# EAGLE board Down Linker ver1.0.0 (EAGLE 9.6.2)
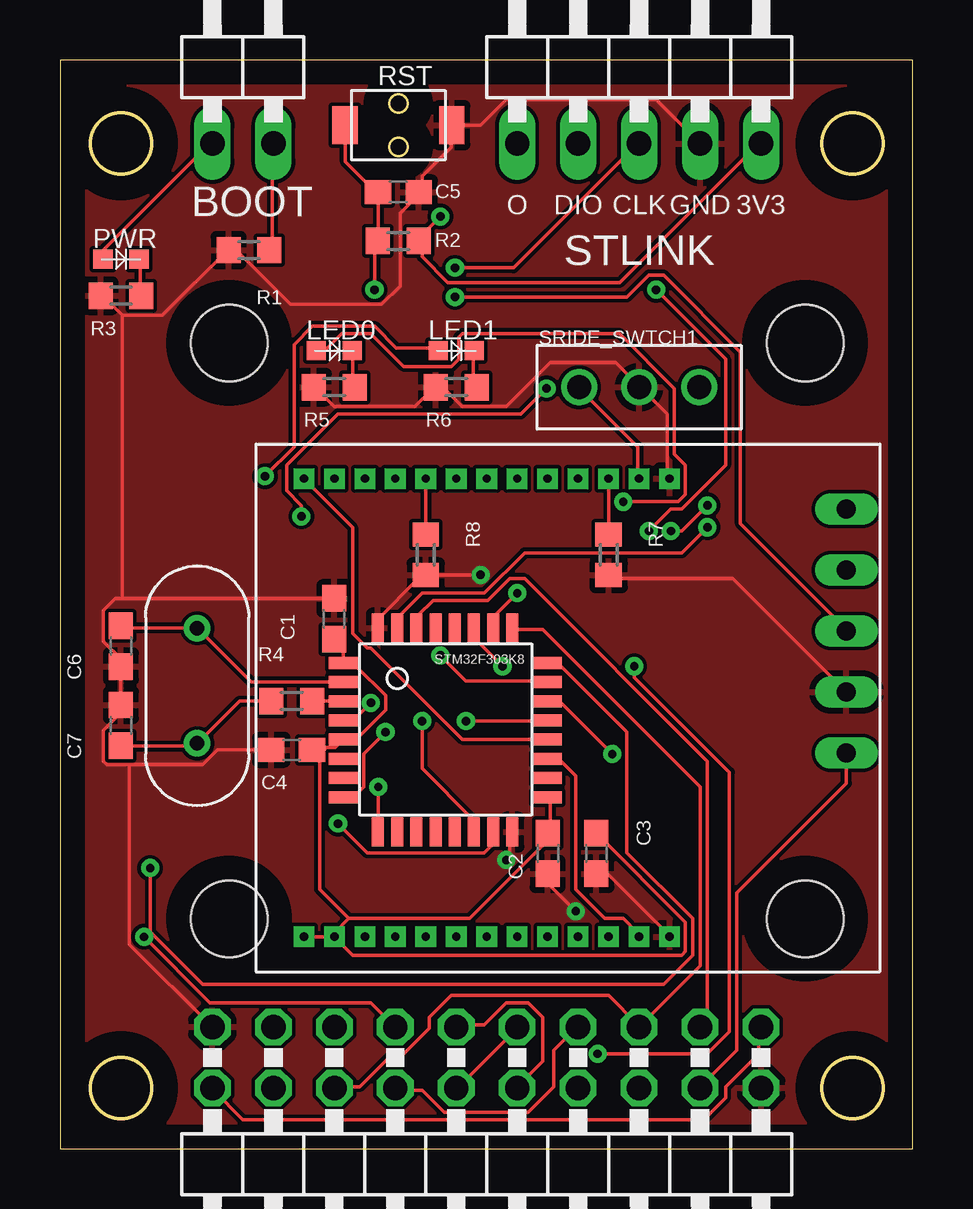
[diagram p0: board, top side]
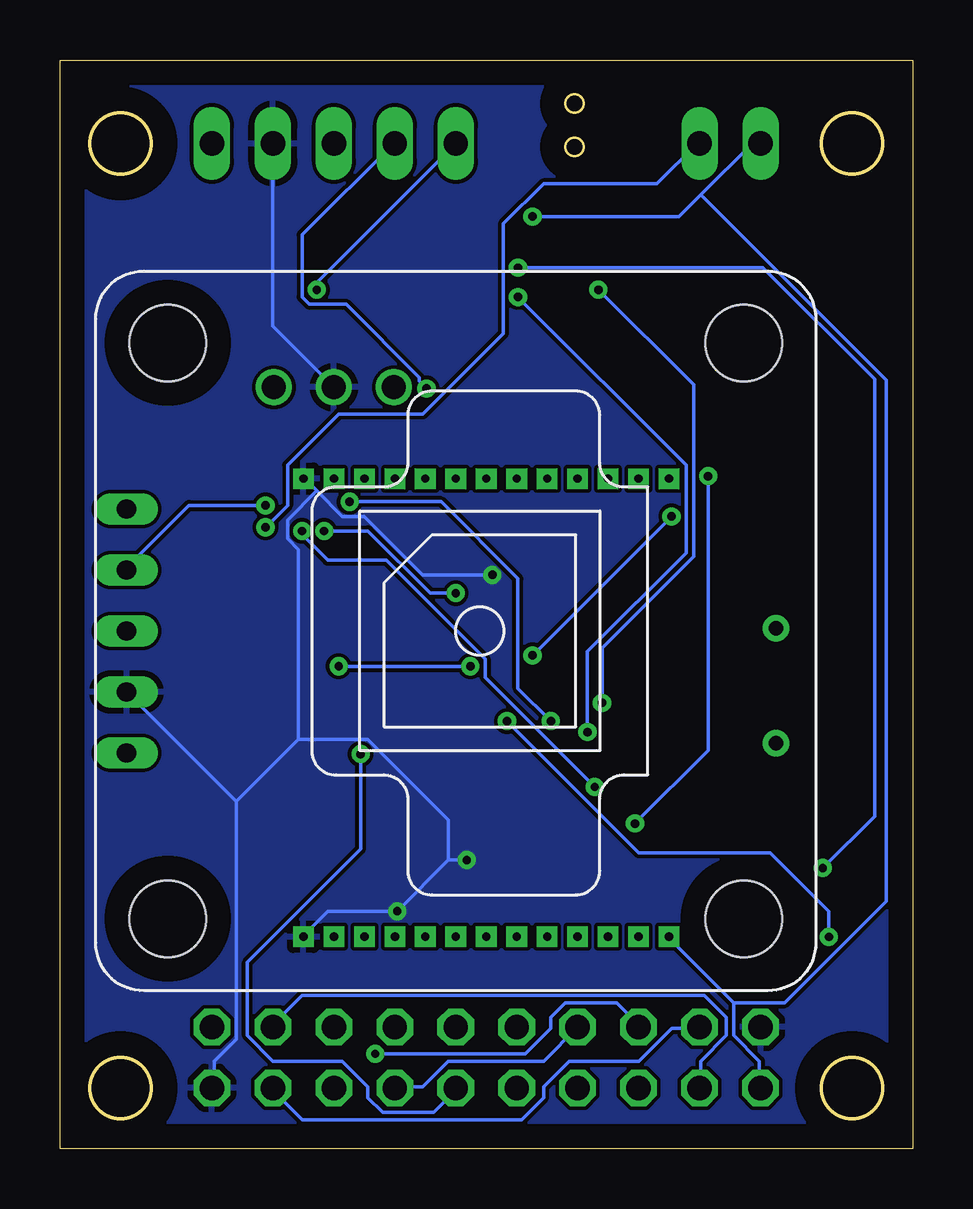
[diagram p1: board, bottom side, seen from below]

Size 35.54 x 45.39 mm. Coordinates in mm from the lower left corner, seen from the top.
Outline: 0,0 35.54,0 35.54,45.39 0,45.39 0,0
Outline: circle at 2.54,2.54 radius 1.27
Outline: circle at 33.02,2.54 radius 1.27
Outline: circle at 33.02,41.91 radius 1.27
Outline: circle at 2.54,41.91 radius 1.27
Copper layers (1*16): Top 0.035mm / dielectric 1.5mm / Bottom 0.035mm
Design rules "default": minimum track width 6mil, minimum drill 0.35mm, track to track 6mil, track to pad 6mil, pad to pad 6mil, via to via 6mil, smd to smd 6mil, copper to edge 40mil, drill to drill 6mil, minimum pad ring 10mil, minimum via ring 8mil, stop-mask expansion 4mil, vias tented up to drill 0mil, thermal gap 10mil

## Footprints (pad centres in the part's own frame; a part is rotated, then mirrored left to right if it is on the bottom)
1X02/90 = drill 1.016 long: 1 -1.27,-3.81; 2 1.27,-3.81
C1608 = smd 1.1 x 1: 1 -0.85,0; 2 0.85,0
CRYSTAL = drill 0.6: P$1 2.4,0; P$2 -2.4,0
2X10/90 = drill 1.016 octagon: 1 -11.43,-6.35; 2 -11.43,-3.81; 3 -8.89,-6.35; 4 -8.89,-3.81; 5 -6.35,-6.35; 6 -6.35,-3.81; 7 -3.81,-6.35; 8 -3.81,-3.81; 9 -1.27,-6.35; 10 -1.27,-3.81; 11 1.27,-6.35; 12 1.27,-3.81; 13 3.81,-6.35; 14 3.81,-3.81; 15 6.35,-6.35; 16 6.35,-3.81; 17 8.89,-6.35; 18 8.89,-3.81; 19 11.43,-6.35; 20 11.43,-3.81
OSXX1608C1A = smd 0.8 x 0.8: AN -0.75,0; CT 0.75,0
R0603 = smd 1 x 1.1: 1 -0.85,0; 2 0.85,0
TVAF06-A020B-R = smd 1.6 x 1.05: P$1 0,2.225; P$2 0,-2.225
SRIDE_SWITCH = drill 1: L -2.5,0; LR 0,0; R 2.5,0
1X05/90 = drill 1.016 long: 1 -5.08,-3.81; 2 -2.54,-3.81; 3 0,-3.81; 4 2.54,-3.81; 5 5.08,-3.81
STM32F303K8 = smd 0.5 x 1.2: BOOT 1.6,8.5; PA3/UART2_RX 0.8,0; PA4/SPI1_NSS 1.6,0; PA5/SPI1_SCK 2.4,0; PA6/SPI1_MISO 3.2,0; PA7/SPI1_MOSI 4,0; PA15/I2C1_SCL 6.4,8.5; PB0 4.8,0; PB1 5.6,0; PB3/SWO 5.6,8.5; PB4 4.8,8.5; PB5 4,8.5; PB6 3.2,8.5; PB7/I2C1_SDA 2.4,8.5; VSS 0.8,8.5; VSS2 6.4,0 | smd 1.2 x 0.5: NRST -0.65,4.65; PA0 -0.65,3.05; PA1 -0.65,2.25; PA2/UART2_TX -0.65,1.45; PA8 7.85,2.25; PA9/UART1_TX 7.85,3.05; PA10/UART1_RX 7.85,3.85; PA11/CAN_RX 7.85,4.65; PA12/CAN_TX 7.85,5.45; PA13/SWDIO 7.85,6.25; PA14/SWCLK 7.85,7.05; PF0 -0.65,6.25; PF1 -0.65,5.45; VDD -0.65,7.05; VDD2 7.85,1.45; VDDA -0.65,3.85
AE-GYSFDMAXB = drill 0.8 long: P1 13.716,5.08; P2 13.716,2.54; P3 13.716,0; P4 13.716,-2.54; P5 13.716,-5.08 | hole 3.2: -12,12; 12,12; 12,-12; -12,-12
RM-92A = drill 0.35 square: - 0,11.43; BOOT0 0,5.08; GND1 0,15.24; GND2 19.1,15.24; PA8 0,6.35; PA9 0,0; PA10 19.1,13.97; PA11 0,8.89; PA12 0,7.62; PA13 19.1,11.43; PA14 19.1,12.7; PA15 19.1,10.16; PB2 0,3.81; PB3 19.1,8.89; PB4 19.1,7.62; PB7 0,10.16; PB10 0,2.54; PB11 0,1.27; PB12 19.1,2.54; PB13 19.1,3.81; PB14 19.1,5.08; PB15 19.1,6.35; PC13 0,12.7; RESET_N 0,13.97; VCC 19.1,1.27; VDDRF 19.1,0

## Placement (x,y rotation side)
BOOT  [1X02/90]  7.62,45.72 0 top
C1  100nF  [C1608]  11.43,22.1 90 top
C2  100nF  [C1608]  20.32,12.32 270 top
C3  4.7uF  [C1608]  22.35,12.32 270 top
C4  10nF  [C1608]  9.65,16.64 180 top
C5  0.1uF  [C1608]  14.1,39.88 0 top
C6  30pF  [C1608]  2.54,20.95 270 top
C7  30pF  [C1608]  2.54,17.65 90 top
CRY1  [CRYSTAL]  5.71,19.3 90 top
JP3  [2X10/90]  17.78,-1.27 180 top
LED0  [OSXX1608C1A]  11.43,33.27 0 top
LED1  [OSXX1608C1A]  16.51,33.27 0 top
PWR  [OSXX1608C1A]  2.54,37.08 0 top
R1  10k  [R0603]  7.87,37.47 180 top
R2  10k or DNF  [R0603]  14.1,37.85 0 top
R3  100  [R0603]  2.54,35.56 0 top
R4  DNF  [R0603]  9.65,18.67 0 top
R5  100  [R0603]  11.43,31.75 0 top
R6  100  [R0603]  16.51,31.75 0 top
R7  10k  [R0603]  22.86,24.77 90 top
R8  10k  [R0603]  15.24,24.77 90 top
RST  [TVAF06-A020B-R]  14.1,42.67 90 top
SRIDE_SWTCH1  SRIDE_SWITCH  [SRIDE_SWITCH]  24.13,31.75 180 top
STLINK  [1X05/90]  24.13,45.72 0 top
U$1  STM32F303K8  [STM32F303K8]  12.45,13.21 0 top
U$2  AE-GYSFDMAXB  [AE-GYSFDMAXB]  19.05,21.59 180 bottom
U$3  RM-92A  [RM-92A]  10.16,27.94 270 top

## Library data of the parts
BOOT JP3 STLINK = pinhead
C1-C7 = rcl; SPICEPREFIX: C
CRY1 = Crystal
LED0 LED1 PWR = Chip LED
R1-R8 = rcl; SPICEPREFIX: R
RST = Tact switch
SRIDE_SWTCH1 = Sride Switch
U$1 = STM32F303K8
U$2 = AE-GYSFDMAXB
U$3 = RM-92A

## Nets
+3V3: BOOT.1 C1.1 C2.1 C3.1 C4.1 JP3.1 JP3.20 PWR.AN R2.2 STLINK.5 U$1.VDD U$1.VDD2 U$1.VDDA U$3.VCC U$3.VDDRF
+5V: JP3.4 JP3.17 U$2.P1
BIT1: JP3.10 JP3.11 U$1.PA12/CAN_TX
BIT2: JP3.8 JP3.13 U$1.PA11/CAN_RX
BOOT0: BOOT.2 R1.1 U$1.BOOT
FP_CHECKER: JP3.15 U$1.PB4
GND: C1.2 C2.2 C3.2 C4.2 C5.2 C6.2 C7.2 JP3.2 JP3.19 R1.2 R3.1 R5.1 R6.1 R7.1 R8.1 RST.P$2 SRIDE_SWTCH1.LR STLINK.4 U$1.VSS U$1.VSS2 U$2.P2 U$3.GND1 U$3.GND2
GPSRX: U$1.PA2/UART2_TX U$2.P3
GPSTX: U$1.PA3/UART2_RX U$2.P4
LED0: LED0.AN U$1.PB0
LED1: LED1.AN U$1.PB1
LOGRX: JP3.7 JP3.14
LOGTX: JP3.9 JP3.12
N$1: PWR.CT R3.2
N$2: LED0.CT R5.2
N$3: C7.1 CRY1.P$2 R4.1
N$4: LED1.CT R6.2
N$6: SRIDE_SWTCH1.R U$3.RESET_N
N$9: R7.2 U$3.PC13
N$10: R8.2 U$3.BOOT0
NRST: C5.1 R2.1 RST.P$1 U$1.NRST
OSC_IN: C6.1 CRY1.P$1 U$1.PF0
OSC_OUT: R4.2 U$1.PF1
PWM: JP3.6
RFRX: U$1.PA9/UART1_TX U$3.PA10
RFTX: U$1.PA10/UART1_RX U$3.PA9
SCL: JP3.5 JP3.16 U$1.PA15/I2C1_SCL
SDA: JP3.3 JP3.18 U$1.PB7/I2C1_SDA
SWCLK: STLINK.3 U$1.PA14/SWCLK
SWDIO: STLINK.2 U$1.PA13/SWDIO
SWO: STLINK.1 U$1.PB3/SWO

## Tracks (layer width: path | path; a pad name or v marks a point on that pad's centre or on a via)
+3V3  (via drill 0.35)
  Top 0.152: C1.1 11.8,20.88 U$1.VDD 11.89,20.12 12.34,20.12 13.56,18.9 13.56,18.29 12.34,17.07 11.89,17.07 U$1.VDDA 11.47,16.74 11.1,16.74 11,16.64 C4.1 10.82,16.61 10.82,10.82 12.04,9.6 | PWR.AN 1.83,37.19 1.83,37.49 6.25,41.91 BOOT.1 | STLINK.5 29.11,41.91 23.32,36.12 16.15,36.12 15.09,37.19 15.09,37.8 R2.2 14.94,37.95 v15.85,38.86 | U$1.VDD2 20.42,14.63 20.42,13.26 C2.1 20.27,13.11 20.27,12.8 17.07,9.6 12.04,9.6 | U$3.VCC 12.19,8.08 25.91,8.08 26.06,8.23 26.06,9.45 22.4,13.11 C3.1 | 12.04,9.6 11.43,8.99 U$3.VCC | U$3.VCC 10.21,8.84 U$3.VDDRF | JP3.1 29.11,5.03 29.11,3.96 27.74,2.59 27.74,2.13 26.82,1.22 7.62,1.22 6.4,2.44 JP3.20
  Bottom 0.152: BOOT.1 6.71,41.91 8.84,39.78 | 8.84,39.78 9.75,38.86 v15.85,38.86 | 7.47,6.1 7.47,4.72 6.4,3.66 6.4,2.59 JP3.20 | 7.47,6.1 10.21,8.84 U$3.VDDRF | 8.84,39.78 1.12,32.05 1.12,10.31 5.33,6.1 7.47,6.1
+5V
  Top 0.152: U$2.P1 32.77,15.24 28.19,10.67 28.19,4.12 26.67,2.59 JP3.4
  Bottom 0.152: JP3.17 8.99,5.03 10.06,5.03 11.43,3.66 14.33,3.66 15.39,2.59 15.39,2.13 16.31,1.22 25.45,1.22 26.67,2.44 JP3.4
BIT1  (via drill 0.35)
  Top 0.152: v23.01,16.46 20.88,18.59 20.42,18.59 U$1.PA12/CAN_TX | JP3.11 16.61,5.18 17.68,5.18 18.59,6.1 19.51,6.1 20.12,5.49 20.12,3.66 19.05,2.59 JP3.10
  Bottom 0.152: v23.01,16.46 23.01,12.5 27.74,7.77 27.74,4.72 26.67,3.66 23.77,3.66 22.71,2.59 22.71,2.13 22.1,1.52 19.96,1.52 19.05,2.44 JP3.10
BIT2  (via drill 0.35)
  Top 0.152: v16.92,17.83 20.27,17.83 U$1.PA11/CAN_RX | v3.5,8.84 6.25,6.1 12.95,6.1 JP3.13
  Bottom 0.152: v16.92,17.83 11.43,12.34 5.94,12.34 3.5,9.91 v3.5,8.84 | JP3.13 15.39,3.66 19.36,3.66 20.42,2.59 21.49,2.59 JP3.8
BOOT0  (via drill 0.35)
  Top 0.152: R1.1 8.84,37.49 8.84,41.91 BOOT.2 | v26.97,25.91 25.91,24.84 19.36,24.84 17.68,23.16 15.09,23.16 14.17,22.25 14.17,21.79 U$1.BOOT
  Bottom 0.152: v26.97,25.91 26.06,26.82 26.06,28.5 23.93,30.63 20.42,30.63 17.07,33.98 17.07,38.56 15.39,40.23 10.67,40.23 8.99,41.91 BOOT.2
FP_CHECKER  (via drill 0.35)
  Top 0.152: v18.44,20.12 17.37,21.18 17.37,21.64 U$1.PB4 | v23.93,20.12 23.93,19.66 27.89,15.7 27.89,4.88 26.97,3.96 v22.4,3.96
  Bottom 0.152: v23.93,20.12 v18.44,20.12 | v22.4,3.96 16.15,3.96 15.09,5.03 15.09,5.49 14.48,6.1 12.34,6.1 11.43,5.18 JP3.15
GND  (via drill 0.35)
  Top 0.152: C4.2 6.55,16.64 5.94,16.02 2.9,16.02 | 2.9,16.02 1.95,16.02 1.81,16.16 1.81,17.45 2.54,18.18 C7.2 C6.2 2.54,20.43 1.81,21.16 1.81,22.45 2.31,22.95 2.59,22.95 | 2.59,22.95 C1.2 | 2.59,34.75 1.83,35.51 R3.1 | 2.59,34.75 4.27,34.75 7.01,37.49 R1.2 7.16,37.34 7.47,37.34 9.6,35.2 13.41,35.2 14.17,35.97 14.17,39.01 14.94,39.78 C5.2 15.09,39.93 15.09,40.54 16.31,41.76 16.31,42.67 RST.P$2 17.53,42.67 18.59,43.74 24.84,43.74 STLINK.4 | JP3.19 2.9,8.53 2.9,16.02 | 2.59,22.95 2.59,34.75 | v21.49,9.91 20.42,10.97 20.42,11.43 C2.2 | C3.2 22.4,11.43 22.86,11.43 25.3,8.99 U$3.GND2 | v18.59,12.04 18.75,12.19 18.75,13.11 U$1.VSS2 | U$2.P2 28.04,23.77 22.86,23.77 R7.1 | R5.1 10.67,31.7 11.43,30.94 14.78,30.94 15.54,31.7 R6.1 15.7,31.7 16,31.7 16.76,30.94 18.59,30.94 20.42,32.77 23.16,32.77 24.08,31.85 SRIDE_SWTCH1.LR 24.23,31.7 25.3,30.63 25.3,28.04 U$3.GND1 | U$1.VSS 13.26,21.79 13.26,22.1 14.94,23.77 15.24,23.77 R8.1 15.24,23.93 v17.53,23.93
  Bottom 0.152: U$3.GND2 25.3,8.99 24.38,9.91 v21.49,9.91 19.36,12.04 | 19.36,12.04 v18.59,12.04 | 28.19,14.48 28.19,4.57 29.11,3.66 29.11,2.59 JP3.2 | U$2.P2 28.19,14.48 | 19.36,12.04 19.36,13.72 22.71,17.07 25.6,17.07 | 28.19,14.48 25.6,17.07 | v17.53,23.93 20.42,23.93 22.86,26.36 23.77,26.36 24.84,27.43 | 24.84,27.43 25.3,27.89 U$3.GND1 | STLINK.4 26.67,34.29 SRIDE_SWTCH1.LR | 25.6,17.07 25.6,24.99 26.06,25.45 26.06,26.21 24.84,27.43
  pour Top: 0,-1.27 -1.27,-1.27 -1.27,46.99 36.83,46.99 36.83,-1.27
  pour Bottom: -1.27,-1.27 -1.27,46.99 36.83,46.99 36.83,-1.27
GPSRX  (via drill 0.35)
  Top 0.152: v13.56,17.37 12.65,16.46 12.65,15.09 12.34,14.78 11.89,14.78 U$1.PA2/UART2_TX | v16.46,35.51 23.62,35.51 24.54,36.42 25.15,36.42 28.35,33.22 28.35,26.06 32.77,21.64 U$2.P3
  Bottom 0.152: v13.56,17.37 13.56,20.73 9.45,24.84 9.45,28.5 v16.46,35.51
GPSTX  (via drill 0.35)
  Top 0.152: v13.26,15.09 13.26,13.26 U$1.PA3/UART2_RX | v25.45,25.76 25.91,25.76 v26.97,26.82
  Bottom 0.152: v13.26,15.09 17.83,19.66 17.83,20.42 21.95,24.54 24.38,24.54 25.45,25.6 v25.45,25.76 | v26.97,26.82 30.17,26.82 32.77,24.23 U$2.P4
LED0  (via drill 0.35)
  Top 0.152: v23.47,26.98 25.76,26.98 26.06,27.28 26.06,28.5 25.6,28.96 25.6,31.7 23.32,33.98 16.76,33.98 16.61,33.83 16.61,32.92 16.31,32.61 14.33,32.61 12.95,33.98 11.73,33.98 11.12,33.38 10.82,33.38 LED0.AN | v15.09,17.83 15.09,15.85 17.22,13.72 17.22,13.26 U$1.PB0
  Bottom 0.152: v23.47,26.98 19.66,26.98 16.46,23.77 16.46,19.2 v15.09,17.83
LED1  (via drill 0.35)
  Top 0.152: v8.53,28.04 9.75,29.26 9.75,33.53 10.52,34.29 13.11,34.29 14.02,33.38 15.7,33.38 LED1.AN | v11.58,13.56 12.8,12.34 17.68,12.34 17.98,12.65 17.98,13.11 U$1.PB1
  Bottom 0.152: v8.53,28.04 8.53,16.61 v11.58,13.56
LOGRX
  Top 0.152: JP3.14 14.02,2.44 15.09,2.44 16,1.52 19.51,1.52 20.57,2.59 20.57,4.12 21.49,5.03 JP3.7
LOGTX
  Top 0.152: JP3.12 16.61,2.59 19.05,5.03 JP3.9
N$1
  Top 0.152: PWR.CT 3.35,37.03 3.35,35.66 R3.2
N$2
  Top 0.152: LED0.CT 12.19,33.22 12.19,31.85 R5.2
N$3
  Top 0.152: C7.1 5.61,16.8 CRY1.P$2 7.48,18.67 R4.1
N$4
  Top 0.152: LED1.CT 17.22,33.22 17.22,31.85 R6.2
N$6
  Top 0.152: U$3.RESET_N 24.08,28.04 24.08,29.26 21.64,31.7 SRIDE_SWTCH1.R
N$9
  Top 0.152: U$3.PC13 R7.2
N$10
  Top 0.152: U$3.BOOT0 R8.2
NRST  (via drill 0.35)
  Top 0.152: v12.95,18.59 12.34,17.98 11.89,17.98 U$1.NRST | v13.11,35.81 13.11,37.8 R2.1 13.26,37.95 13.26,39.78 C5.1 13.11,39.93 11.89,41.15 11.89,42.67 RST.P$1
  Bottom 0.152: v12.95,18.59 12.95,20.88 9.14,24.69 9.14,31.85 v13.11,35.81
OSC_IN
  Top 0.152: U$1.PF0 7.96,19.46 CRY1.P$1 2.64,21.7 C6.1
OSC_OUT
  Top 0.152: R4.2 11.79,18.67 U$1.PF1
RFRX
  Top 0.152: U$1.PA9/UART1_TX 20.42,16.15 20.88,16.15 21.49,15.54 21.49,10.82 22.71,9.6 23.47,9.6 24.08,8.99 U$3.PA10
RFTX
  Top 0.152: U$3.PA9 12.19,25.91 12.19,21.49 12.8,20.88 12.95,20.88 16.76,17.07 20.27,17.07 U$1.PA10/UART1_RX
SCL
  Top 0.152: U$1.PA15/I2C1_SCL 18.9,21.64 20.12,21.64 26.67,15.09 26.67,7.62 JP3.5 24.08,5.18 22.86,6.4 16.31,6.4 15.39,5.49 15.39,5.03 14.33,3.96 13.87,3.96 12.5,2.59 11.43,2.59 JP3.16
SDA
  Top 0.152: U$1.PB7/I2C1_SDA 14.94,21.79 14.94,22.25 15.54,22.86 17.83,22.86 18.75,23.77 19.36,23.77 26.97,16.15 26.97,5.49 26.67,5.18 JP3.3
  Bottom 0.152: JP3.18 8.84,2.59 8.84,3.66 7.77,4.72 7.77,5.49 8.69,6.4 25.45,6.4 26.67,5.18 JP3.3
SWCLK  (via drill 0.35)
  Top 0.152: v3.76,11.71 3.76,9.04 5.94,6.86 25.15,6.86 26.36,8.08 26.36,9.6 23.62,12.34 23.62,17.37 20.88,20.12 20.42,20.12 U$1.PA14/SWCLK | v16.46,36.73 18.9,36.73 24.08,41.91 STLINK.3
  Bottom 0.152: v3.76,11.71 1.6,13.87 1.6,32.08 6.25,36.73 v16.46,36.73
SWDIO  (via drill 0.35)
  Top 0.152: v15.85,20.57 16.92,19.51 20.27,19.51 U$1.PA13/SWDIO | v10.06,26.36 10.06,26.82 9.45,27.43 9.45,28.5 11.58,30.63 19.2,30.63 v20.27,31.7
  Bottom 0.152: v10.06,26.36 v15.85,20.57 | v20.27,31.7 20.57,32 20.57,32.16 23.62,35.2 25.15,35.2 25.45,35.51 25.45,38.1 21.64,41.91 STLINK.2
SWO  (via drill 0.35)
  Top 0.152: v19.05,23.16 18.14,22.25 18.14,21.79 U$1.PB3/SWO | v24.54,25.76 25.45,26.67 25.91,26.67 27.74,28.5 27.74,32.92 v24.84,35.81
  Bottom 0.152: v19.05,23.16 20.12,23.16 22.71,25.76 v24.54,25.76 | v24.84,35.81 24.84,36.12 STLINK.1

## Text on the board
tPlace: O | DIO | CLK | GND | 3V3